# Allegro board AX7Z100B_PCB_Allegro.brd
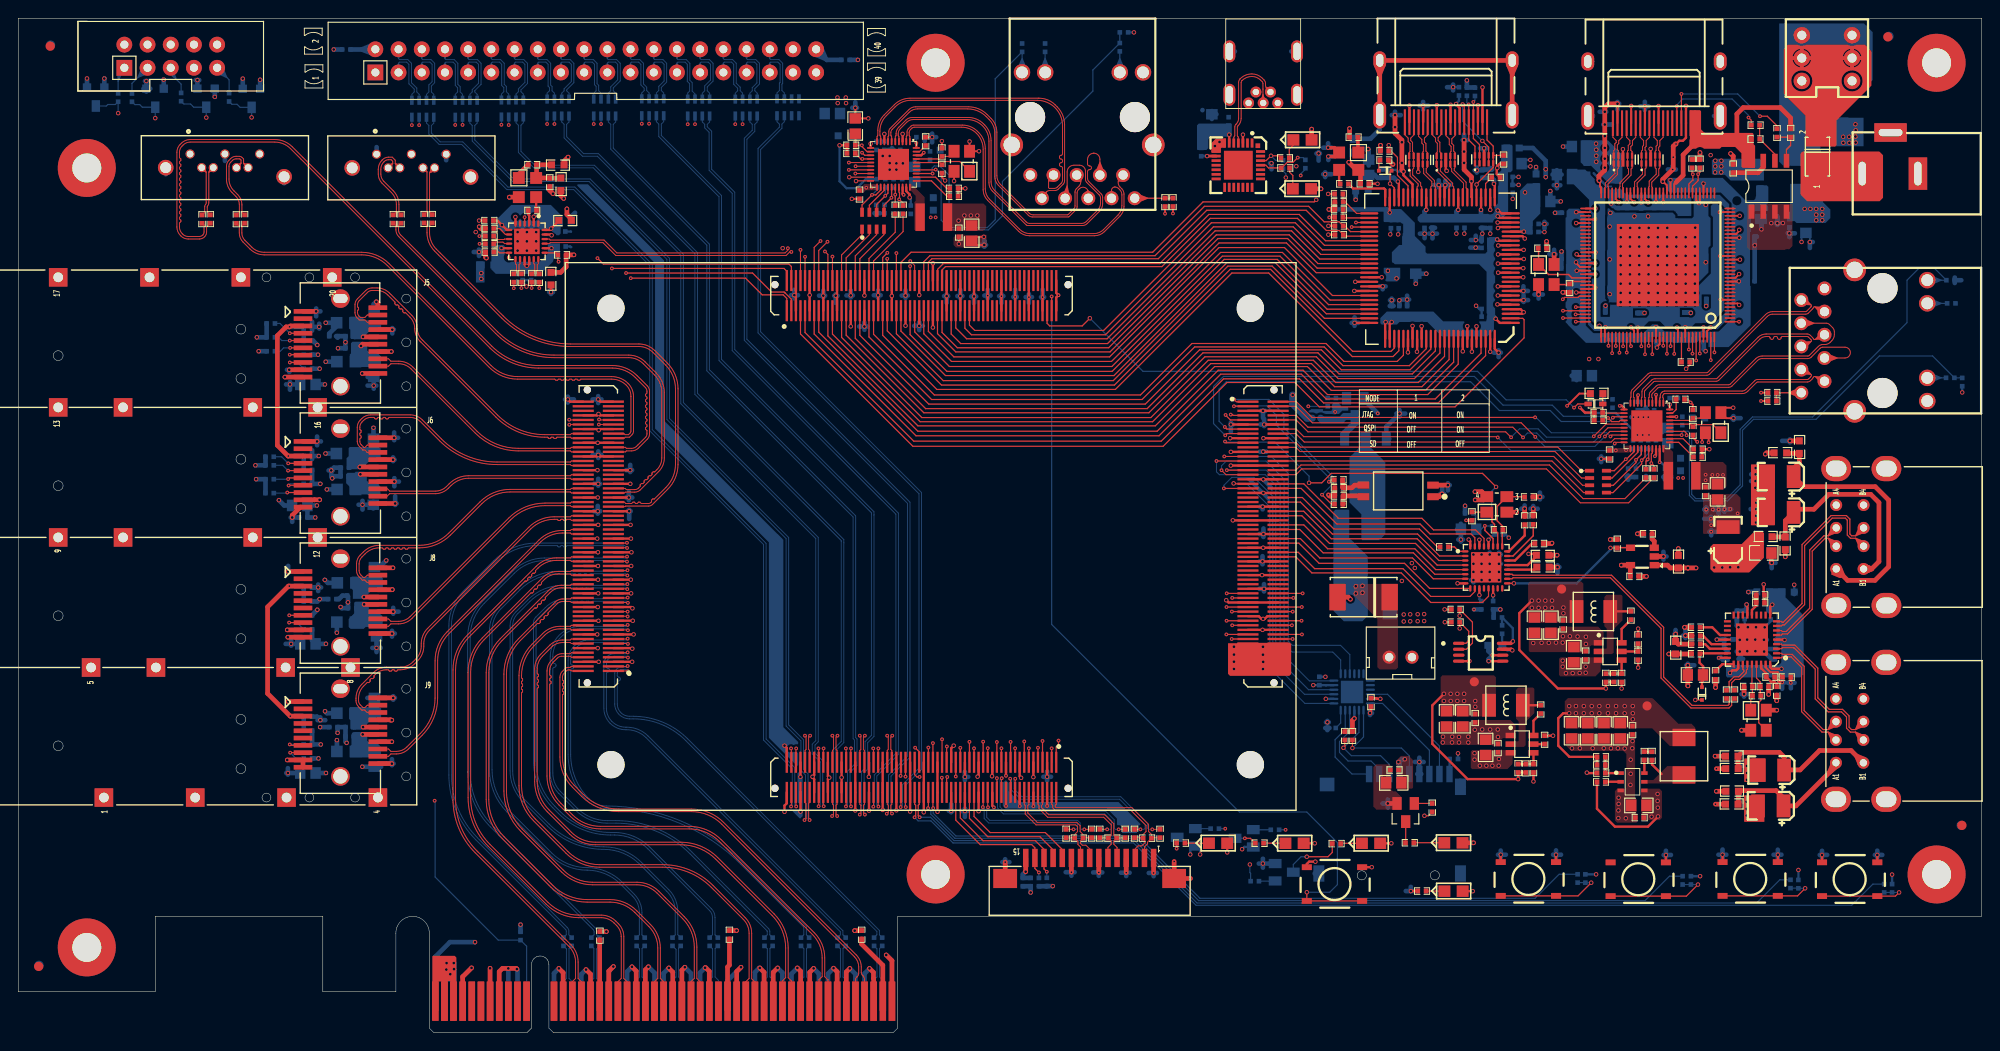
[diagram p0: board, top side]
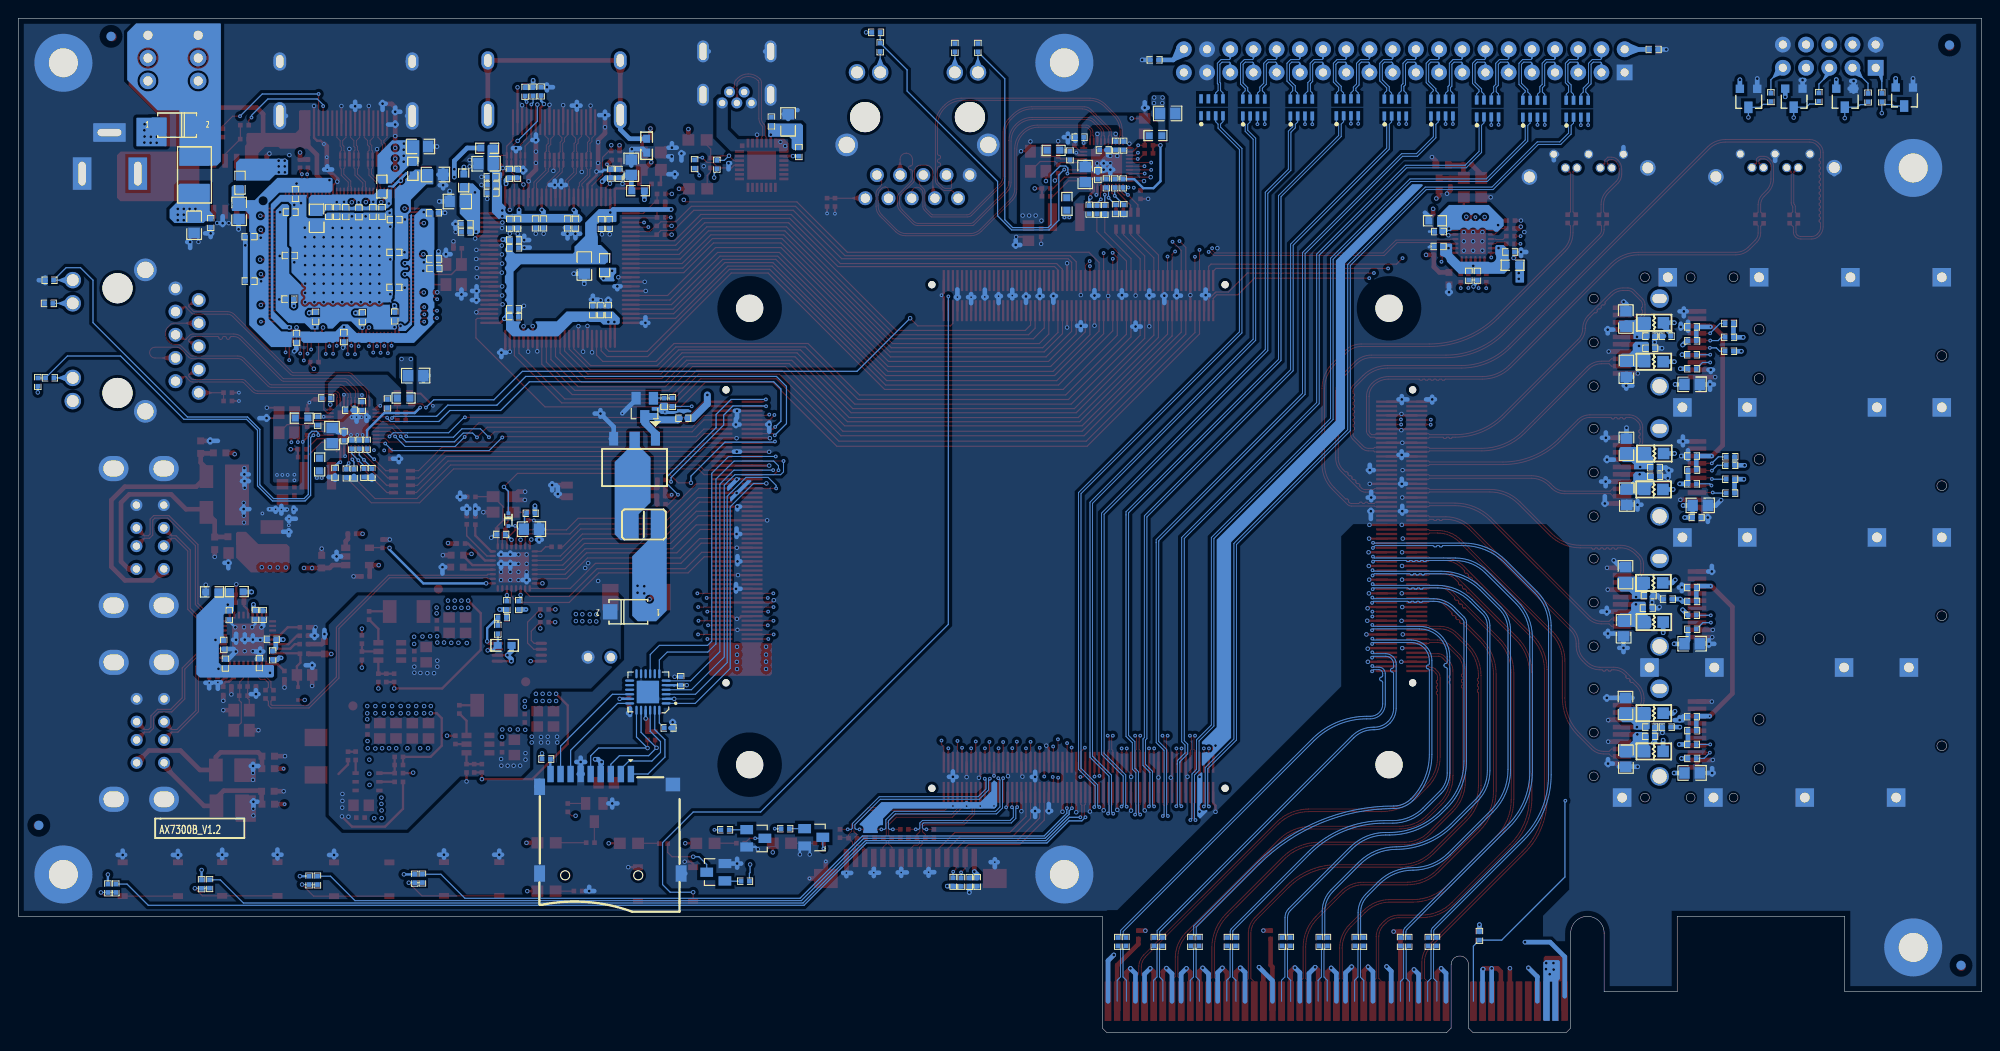
[diagram p1: board, bottom side, seen from below]

Outline 214.96 x 111.15 mm; copper layers: TOP, L2_GND, L3, L4_VCC, L5_GND, BOTTOM. Coordinates in mm from the lower left corner of the outline.
Outline path: 0,111.15 0,4.5 15,4.5 15,12.75 33.34,12.75 33.34,4.5 41.34,4.5 41.34,10.92 arc(43.17,12.75) 45,10.92 45,0.51 45.51,0 55.68,0 56.19,0.51 56.19,7.45 arc(57.14,8.41) 58.09,7.45 58.09,0.51 58.6,0 95.77,0 96.28,0.51 96.28,12.75 214.96,12.75 214.96,111.15 0,111.15

## Design rules (mm)
net group DP5: nets N23471993 N23471995
net group DP6: nets N23472019 N23472037
net group DP7: nets N23472053 N23472055
net group DP8: nets N23472069 N23472089
net group GTX_CLK0_C_N: nets GTX_CLK0_C_N GTX_CLK0_C_P
net group GTX_CLK1_C_P: nets GTX_CLK1_C_N GTX_CLK1_C_P
net group GTX_CLK2_C_P: nets GTX_CLK2_C_N GTX_CLK2_C_P
net group IO1_12P: nets IO1_12N IO1_12P
net group IO1_16P: nets IO1_16N IO1_16P
net group LP_CLK_P: nets LP_CLK_N LP_CLK_P
net group LP_LANE0_N: nets LP_LANE0_N LP_LANE0_P
net group LP_LANE1_N: nets LP_LANE1_N LP_LANE1_P
net group PCIE_RX4: nets PCIE_RX4_N PCIE_RX4_P
net group PCIE_RX5: nets PCIE_RX5_N PCIE_RX5_P
net group PCIE_RX6: nets PCIE_RX6_N PCIE_RX6_P
net group PCIE_RX7: nets PCIE_RX7_N PCIE_RX7_P
net group PCIE_TX4: nets PCIE_TX4_N PCIE_TX4_P
net group PCIE_TX5: nets PCIE_TX5_N PCIE_TX5_P
net group PCIE_TX6: nets PCIE_TX6_N PCIE_TX6_P
net group PCIE_TX7: nets PCIE_TX7_N PCIE_TX7_P
net group PHY1_MDI0: nets PHY1_MDI0_N PHY1_MDI0_P
net group PHY1_MDI1: nets PHY1_MDI1_N PHY1_MDI1_P
net group PHY1_MDI2: nets PHY1_MDI2_N PHY1_MDI2_P
net group PHY1_MDI3: nets PHY1_MDI3_N PHY1_MDI3_P
net group PHY2_MDI0: nets PHY2_MDI0_N PHY2_MDI0_P
net group PHY2_MDI1: nets PHY2_MDI1_N PHY2_MDI1_P
net group PHY2_MDI2: nets PHY2_MDI2_N PHY2_MDI2_P
net group PHY2_MDI3: nets PHY2_MDI3_N PHY2_MDI3_P
net group USB: nets N16523963 N16524061
net group 90OHM: nets DN1 DN2 DN3 DN4 DP1 DP2 DP3 DP4 OTG_D_N OTG_D_P USB_DM USB_DP
net group ETH_RX: nets PHY1_RXCK PHY1_RXCTL PHY1_RXD0 PHY1_RXD1 PHY1_RXD2 PHY1_RXD3 PHY2_RXCK PHY2_RXCTL PHY2_RXD0 PHY2_RXD1 PHY2_RXD2 PHY2_RXD3
net group ETH_TX: nets PHY1_TXCK PHY1_TXCTL PHY1_TXD0 PHY1_TXD1 PHY1_TXD2 PHY1_TXD3 PHY2_TXCK PHY2_TXCTL PHY2_TXD0 PHY2_TXD1 PHY2_TXD2 PHY2_TXD3
net group HDMI: nets HDMI_TX0+ HDMI_TX0- HDMI_TX1+ HDMI_TX1- HDMI_TX2+ HDMI_TX2- HDMI_TXC+ HDMI_TXC- RX_0N RX_0P RX_1N RX_1P RX_2N RX_2P RX_CN RX_CP
net group IO1-DIFF: nets B12_L1_N B12_L1_P B12_L2_N B12_L2_P EX_IO1_1N EX_IO1_1P EX_IO1_2N EX_IO1_2P EX_IO1_3N EX_IO1_3P EX_IO1_4N EX_IO1_4P EX_IO1_5N EX_IO1_5P EX_IO1_6N EX_IO1_6P EX_IO1_7N EX_IO1_7P EX_IO1_8N EX_IO1_8P EX_IO1_9N EX_IO1_9P EX_IO1_10N EX_IO1_10P EX_IO1_11N EX_IO1_11P EX_IO1_12N EX_IO1_12P EX_IO1_13N EX_IO1_13P EX_IO1_14N EX_IO1_14P EX_IO1_15N EX_IO1_15P EX_IO1_16N EX_IO1_16P EX_IO1_17N EX_IO1_17P FAN_PWM IO1_3N IO1_3P IO1_4N IO1_4P IO1_5N IO1_5P IO1_6N IO1_6P IO1_7N IO1_7P IO1_8N IO1_8P IO1_9N IO1_9P IO1_10N IO1_10P IO1_11N IO1_11P IO1_13N IO1_13P IO1_14N IO1_14P IO1_15N IO1_15P IO1_17N IO1_17P
net group MIPI: nets MIPI_CLK_N MIPI_CLK_P MIPI_LAN0_N MIPI_LAN0_P MIPI_LAN1_N MIPI_LAN1_P
net group OTG_DATA: nets OTG_CLK OTG_DATA0 OTG_DATA1 OTG_DATA2 OTG_DATA3 OTG_DATA4 OTG_DATA5 OTG_DATA6 OTG_DATA7 OTG_DIR OTG_NXT OTG_STP
net group PCIE: nets N23088557 N23088559 N23088561 N23088563 N23088565 N23088567 N23088569 N23088571 N23088604 N23088606
net group SATA-DIFF: nets GTX_CLK0_N GTX_CLK0_P GTX_CLK1_N GTX_CLK1_P GTX_CLK2_N GTX_CLK2_P REF_CLK0_N REF_CLK0_P SATA1_RX_N SATA1_RX_P SATA1_TX_C_N SATA1_TX_C_P SATA2_RX_C_N SATA2_RX_C_P SATA2_RX_N SATA2_RX_P SATA2_TX_N SATA2_TX_P
net group SD_D: nets SD_CLK SD_CMD SD_D0 SD_D1 SD_D2 SD_D3
nets with their own width: min track width 0.203; nets GND
nets with their own width: min track width 0.254; nets +3.3V

## Placement (name value [footprint] x y rotation side)
C92  18pF  [C0402]  166.86 85.94 0 top
C93  18pF  [C0402]  169.84 81.59 270 top
C94  10uF  [C0805]  170.93 97.09 180 bottom
C95  10uF  [C0805]  169.29 94.02 180 bottom
C96  0.1uF  [C0402]  185.13 89.91 180 bottom
C97  0.1uF  [C0402]  173.8 81.66 0 bottom
C98  0.1uF  [C0402]  185.27 80.38 180 bottom
C99  0.1uF  [C0402]  173.77 89.09 0 bottom
C100  0.1uF  [C0402]  173.75 78.49 90 bottom
C101  0.1uF  [C0402]  177.29 78.4 90 bottom
C102  0.1uF  [C0402]  185.23 85.16 180 bottom
C103  0.1uF  [C0402]  173.8 85.5 0 bottom
C104  0.1uF  [C0402]  182.42 78.46 90 bottom
C105  10uF  [C0805]  190.79 89.99 270 bottom
C106  0.1uF  [C0402]  169.39 83.73 180 bottom
C107  0.1uF  [C0402]  179.32 76.19 270 bottom
C108  0.1uF  [C0402]  184.61 91.88 270 bottom
C109  0.1uF  [C0402]  169.45 89.84 180 bottom
C110  0.1uF  [C0402]  184.5 76.13 270 bottom
C111  0.1uF  [C0402]  169.42 84.77 180 bottom
C112  0.1uF  [C0402]  189.66 87.23 0 bottom
C113  0.1uF  [C0402]  189.65 82.35 0 bottom
C114  10uF  [C0805]  182.31 89.24 270 bottom
C115  0.1uF  [C0402]  180.97 89.92 270 bottom
C116  0.1uF  [C0402]  180.1 89.92 270 bottom
C117  0.1uF  [C0402]  175.13 89.91 270 bottom
C118  0.1uF  [C0402]  177.67 89.87 270 bottom
C119  0.1uF  [C0402]  176.14 89.91 270 bottom
C120  0.1uF  [C0402]  179.11 89.9 270 bottom
C144  0.1uF  [C0402]  110.84 16.51 270 bottom
C145  1uF  [C0402]  109.98 16.51 270 bottom
C146  0.1uF  [C0402]  176.73 33.14 270 top
C147  22uF  [C0805]  175.39 33.09 270 top
C151  22pF  [C0402]  173.3 30.23 0 top
C152  0.1uF/25V  [C0402]  177.5 23.57 180 top
C154  22uF/25V  [C0805]  177.42 24.92 180 top
C156  0.1uF  [C0402]  35.91 107.73 180 bottom
C157  0.1uF  [C0402]  90.57 106.59 0 bottom
C276  0.1uF  [C0402]  59.69 9.97 90 bottom
C277  0.1uF  [C0402]  60.58 9.97 90 bottom
C278  0.1uF  [C0402]  62.74 9.97 90 bottom
C279  0.1uF  [C0402]  63.63 9.97 90 bottom
C280  0.1uF  [C0402]  67.7 9.97 90 bottom
C281  0.1uF  [C0402]  68.58 9.97 90 bottom
C282  0.1uF  [C0402]  71.63 9.97 90 bottom
C283  0.1uF  [C0402]  72.52 9.97 90 bottom
C284  0.1uF  [C0402]  75.7 9.97 90 bottom
C285  0.1uF  [C0402]  76.59 9.97 90 bottom
C286  0.1uF  [C0402]  81.7 9.97 90 bottom
C287  0.1uF  [C0402]  82.59 9.97 90 bottom
C288  0.1uF  [C0402]  85.7 9.97 90 bottom
C289  0.1uF  [C0402]  86.59 9.97 90 bottom
C290  0.1uF  [C0402]  89.7 9.97 90 bottom
C291  0.1uF  [C0402]  90.59 9.97 90 bottom
C292  0.1uF  [C0402]  93.7 9.97 90 bottom
C293  0.1uF  [C0402]  94.59 9.97 90 bottom
C294  10uF  [C0805]  38.92 72.68 270 bottom
C295  0.1uF  [C0402]  36.28 74.99 180 bottom
C296  10uF  [C0805]  38.96 78.2 90 bottom
C323  4.7uF  [C0603]  187.64 26.46 180 top
C324  4.7uF  [C0603]  187.6 30.3 180 top
C325  2.2uF  [C0603]  166.89 52.32 0 top
C326  0.1uF  [C0402]  189.01 45.78 270 bottom
C327  0.1uF  [C0402]  160.17 46.84 270 bottom
C328  0.1uF  [C0402]  162.1 54.59 0 bottom
C329  0.1uF  [C0402]  161.47 46.84 270 bottom
C330  4.7uF  [C0603]  195 64.16 90 top
C331  4.7uF  [C0603]  193.46 53.62 270 top
C332  10uF  [C0805]  183.62 39.2 180 top
C333  2.2uF  [C0603]  181.44 42.18 90 top
C334  0.01uF  [C0402]  188.16 45.77 270 bottom
C335  0.01uF  [C0402]  187.22 43.1 0 bottom
C336  0.01uF  [C0402]  192.29 40.46 90 bottom
C337  0.01uF  [C0402]  192.47 42.5 270 bottom
C338  0.01uF  [C0402]  191.87 45.73 270 bottom
C339  0.01uF  [C0402]  188.57 40.5 90 bottom
C340  10uF  [C0805]  158.78 55.17 180 bottom
C341  4.7uF  [C0603]  166.94 51.01 180 top
C342  18pF  [C0402]  159.15 56.6 90 top
C343  18pF  [C0402]  165.37 58.71 180 top
C344  1uF  [C0402]  192.52 37.45 270 top
C345  0.1uF  [C0402]  191.84 38.98 0 top
C346  1uF  [C0402]  190.72 47.97 0 top
C347  0.1uF  [C0402]  190.72 47.12 0 top
C348  18pF  [C0402]  189.4 37.94 0 top
C349  18pF  [C0402]  191.18 37.94 180 top
C350  22uF  [C0805]  191.1 52.56 0 top
C351  100uF  [TAN-SMB]  187.19 54 270 top
C352  4.7uF  [C0603]  181.75 51.61 90 top
C353  0.1uF  [C0402]  176.94 50 0 top
C354  22uF  [C0805]  30.82 57.77 180 bottom
C355  0.1uF  [C0402]  35.74 60.97 180 bottom
C356  0.1uF  [C0402]  31.2 56.45 180 bottom
C357  22uF  [C0805]  31.71 42.61 180 bottom
C358  1uF  [C0402]  132.51 99.85 90 bottom
C361  10uF  [C0805]  130.68 99.79 90 bottom
C362  10uF  [C0805]  150.59 27.39 180 top
C363  0.1uF  [C0402]  150.67 28.78 180 top
C364  0.1uF  [C0402]  142.44 38.54 90 bottom
C365  0.1uF  [C0402]  148.1 36.2 270 top
C366  4.7uF  [C0603]  58.33 82.62 270 top
C367  0.1uF  [C0402]  34.38 47.51 0 bottom
C368  0.1uF  [C0402]  58.18 93.17 270 top
C369  4.7uF  [C0603]  59.85 88.93 0 bottom
C370  0.1uF  [C0402]  51.56 88.99 180 top
C371  0.1uF  [C0402]  59.43 87.78 0 bottom
C372  4.7uF  [C0603]  59.07 95.08 0 top
C373  0.1uF  [C0402]  51.61 85.54 180 bottom
C374  0.1uF  [C0402]  55.21 82.93 270 bottom
C375  0.1uF  [C0402]  56.15 82.93 270 bottom
C376  0.1uF  [C0402]  35.77 61.91 180 bottom
C377  0.1uF  [C0402]  59.47 86.15 0 bottom
C378  10uF  [C0805]  38.89 64.25 90 bottom
C379  1uF  [C0402]  144.58 89.33 180 top
C380  1uF  [C0402]  144.57 91.9 180 top
C381  0.1uF  [C0402]  147.41 93.02 0 top
C382  0.01uF  [C0402]  160.32 94.13 90 bottom
C383  0.01uF  [C0402]  166 88.62 0 bottom
C384  1uF  [C0402]  165.98 87.74 0 bottom
C385  0.1uF  [C0402]  161.2 94.12 90 bottom
C386  0.1uF  [C0402]  150.07 94.13 90 bottom
C387  10uF  [C0805]  147.84 94.82 90 bottom
C388  0.01uF  [C0402]  149.21 94.12 90 bottom
C389  10uF  [C0805]  166.9 91.08 0 bottom
C390  0.01uF  [C0402]  150.28 88.6 270 bottom
C391  0.01uF  [C0402]  150.37 79.17 90 bottom
C392  0.01uF  [C0402]  160.67 79.3 180 bottom
C393  0.01uF  [C0402]  151.21 79.17 90 bottom
C394  0.01uF  [C0402]  152.06 79.16 90 bottom
C395  0.1uF  [C0402]  160.67 78.46 180 bottom
C396  0.1uF  [C0402]  160.66 86 180 bottom
C397  0.1uF  [C0402]  160.66 86.85 180 bottom
C398  1uF  [C0402]  151.12 88.59 270 bottom
C399  10uF  [C0805]  153 84 270 bottom
C400  0.01uF  [C0402]  163.14 92.89 0 bottom
C401  0.01uF  [C0402]  154.82 88.65 270 bottom
C402  0.01uF  [C0402]  163.15 93.77 0 bottom
C403  0.01uF  [C0402]  163.16 92.01 0 bottom
C404  0.01uF  [C0402]  160.29 88.63 270 bottom
C405  0.1uF  [C0402]  153.96 88.64 270 bottom
C406  0.1uF  [C0402]  158.33 88.65 270 bottom
C407  0.1uF  [C0402]  161.16 88.63 270 bottom
C408  1uF  [C0402]  157.47 88.65 270 bottom
C409  10uF  [C0805]  163.75 95.22 0 bottom
C436  0.1uF  [C0402]  161.99 45.49 180 bottom
C437  10uF  [C0805]  38.87 58.69 270 bottom
C438  0.1uF  [C0402]  36.28 76.32 180 bottom
C439  0.1uF  [C0402]  34.5 76.32 0 bottom
C440  10uF  [C0805]  38.99 50.18 90 bottom
C441  0.1uF  [C0402]  36.28 32.47 180 bottom
C442  0.1uF  [C0402]  36.45 47.89 180 bottom
C443  10uF  [C0805]  38.99 35.85 90 bottom
C444  10uF  [C0805]  39.22 44.26 270 bottom
C445  10uF  [C0805]  38.97 29.98 270 bottom
C446  0.1uF  [C0402]  36.55 46.52 180 bottom
C447  0.1uF  [C0402]  36.28 33.49 180 bottom
C448  0.1uF  [C0402]  34.5 33.49 0 bottom
C449  22uF  [C0805]  31.71 28.46 180 bottom
C450  22uF  [C0805]  31.71 71.03 180 bottom
C451  2.2uF  [C0603]  193.75 48.28 0 bottom
C452  100uF  [TAN-SMB]  191.87 24.86 0 top
C453  100uF  [TAN-SMB]  191.93 28.78 0 top
C454  100uF  [TAN-SMB]  192.97 57.01 0 top
C455  100uF  [TAN-SMB]  192.97 60.93 0 top
C456  0.1uF  [C0402]  51.6 86.44 180 top
C457  0.1uF  [C0402]  51.59 87.28 180 top
C458  0.1uF  [C0402]  55.09 82.69 270 top
C459  0.1uF  [C0402]  54.25 82.69 270 top
C460  0.1uF  [C0402]  57.04 82.68 270 top
C461  0.1uF  [C0402]  56.2 82.69 270 top
C466  0.1uF  [C0402]  20.12 89.14 90 top
C467  0.1uF  [C0402]  21.02 89.15 90 top
C468  0.1uF  [C0402]  24.77 89.15 90 top
C469  0.1uF  [C0402]  23.88 89.14 90 top
C470  0.1uF  [C0402]  41.9 89.15 90 top
C471  0.1uF  [C0402]  41.07 89.15 90 top
C472  0.1uF  [C0402]  44.44 89.17 90 top
C473  0.1uF  [C0402]  45.33 89.17 90 top
C648  10uF/25V  [C0805]  195.72 88.48 270 bottom
C649  0.1uF 25V  [C0402]  193.9 88.7 270 bottom
C673  0.1uF/25V  [C0402]  192.03 69.22 180 top
C674  1uF/25V  [C0402]  192.03 70.13 180 top
C675  18pF  [C0402]  183.34 65.94 270 top
C676  18pF  [C0402]  183.33 67.79 90 top
C681  100uF 25V  [D7343]  147.29 47.73 180 top
C795  0.1uF  [C0402]  94.82 97.18 270 bottom
C796  0.1uF  [C0402]  92.1 91.82 270 top
C797  0.1uF  [C0402]  96.11 96.72 180 bottom
C798  22uF  [C0805]  89.13 100.71 180 bottom
C799  0.1uF  [C0402]  98.78 98.12 0 bottom
C800  0.1uF  [C0402]  93.95 97.18 270 bottom
C801  22uF  [C0805]  98.15 94.03 90 bottom
C802  0.1uF  [C0402]  96.77 93.98 90 bottom
C803  0.1uF  [C0402]  97.71 90.17 270 bottom
C805  18pF  [C0402]  101.12 94.64 270 top
C806  18pF  [C0402]  101.12 96.47 90 top
C807  22uF  [C0805]  104.37 87.6 270 top
C808  0.1uF  [C0402]  102.98 87.66 270 top
C809  0.1uF  [C0402]  99.82 96.11 270 bottom
C810  10uF  [C0805]  91.64 99.34 90 top
C811  0.1uF/25V  [C0402]  126.42 90.98 270 top
C812  1uF/25V  [C0402]  125.55 90.98 270 top
C813  22uF  [C0805]  173.61 33.09 270 top
C814  22uF/25V  [C0805]  170.31 41.42 90 top
C815  0.01uF/25V  [C0402]  176.56 45.72 90 top
C816  150pF  [C0402]  173.81 38.88 270 top
C817  22uF  [C0805]  167.8 44.65 270 top
C818  22uF  [C0805]  165.99 44.65 270 top
C819  0.1uF  [C0402]  169.14 44.72 270 top
C820  0.1uF/25V  [C0402]  171.6 41.35 90 top
C825  22uF  [C0805]  170.05 33.09 270 top
C826  22uF  [C0805]  171.83 33.08 270 top
C1483  22uF  [C0805]  186.03 59.26 270 top
C1484  0.1uF  [C0402]  184.73 59.32 270 top
C1485  0.1uF  [C0402]  178.64 68.2 180 bottom
C1486  0.1uF  [C0402]  182.19 67.03 270 bottom
C1487  0.1uF  [C0402]  174.22 63.35 270 top
C1488  0.1uF  [C0402]  177.31 68.66 270 bottom
C1489  22uF  [C0805]  171.45 71.98 180 bottom
C1490  0.1uF  [C0402]  181.25 69.54 0 bottom
C1491  0.1uF  [C0402]  174.54 68.94 270 bottom
C1492  22uF  [C0805]  180.59 65.43 90 bottom
C1493  0.1uF  [C0402]  179.3 65.35 90 bottom
C1494  0.1uF  [C0402]  180.28 61.34 270 bottom
C1504  NC  [C0603]  172.8 70.03 180 top
C1505  0.1uF/25V  [C0402]  178.87 30.33 270 top
C1506  0.1uF/25V  [C0402]  162 31.19 90 top
C1507  22uF/25V  [C0805]  160.66 31.26 90 top
C1508  22uF  [C0805]  158.15 34.39 270 top
C1509  22uF  [C0805]  156.37 34.39 270 top
C1510  0.1uF  [C0402]  159.51 34.46 270 top
C1511  150pF  [C0402]  164.21 28.97 270 top
C1512  0.01uF/25V  [C0402]  166.68 35.43 90 top
CN2  AJ243-3-3C  [CN1-DCJACK]  207.98 94.13 90 top
D4  BAT54S  [SOT23]  7.52 103.56 0 bottom
D5  BAT54S  [SOT23]  14.03 103.43 0 bottom
D6  BAT54S  [SOT23]  19.61 103.43 0 bottom
D7  BAT54S  [SOT23]  24.58 103.42 0 bottom
D9  -  [BAS16XV2T1G]  161.31 56.22 270 bottom
D10  -  [BAS16XV2T1G]  184.33 37.16 90 top
D14  LED  [LED_0805]  131.36 20.76 270 top
D15  LED  [LED_0805]  139.73 20.75 270 top
D16  LED  [LED_0805]  148.11 20.75 270 top
D17  LED  [LED_0805]  157.12 20.81 270 top
D18  LED  [LED_0805]  157.14 15.51 270 top
D20  -  [BAS16XV2T1G]  149.66 94.44 180 top
D22  B340A  [DO-214AC]  148.17 46.12 0 bottom
D27  B340A  [DO-214AC]  197.57 99.44 180 bottom
D28  B340A  [DO-214AC]  196.98 95.99 90 top
D35  BAS16XV2T1G  [SOD-523]  172.67 68.89 270 top
F3  3A  [FUSE_1812]  195.67 93.99 270 bottom
J2  HR911130A  [GE_RJ45]  204.1 70.09 0 top
J3  DUAL USB  [DUAL_USB]  201.75 33.08 90 top
J4  DUAL USB  [DUAL_USB]  201.78 54.31 90 top
J5  SFP & CONN  [SFP_CON]  31.17 79.04 0 top
J6  SFP & CONN  [SFP_CON]  31.17 64.79 0 top
J7  HDMI IN  [HDMI_A_TYPE]  186.58 98.5 270 top
J8  SFP & CONN  [SFP_CON]  31.17 50.54 0 top
J9  SFP & CONN  [SFP_CON]  31.17 36.29 0 top
J10  CON15  [FPC100C047]  117.3 18.03 180 top
J11  MINI_USB  [MINI_USB_DIP]  136.3 102.77 180 top
J12  Micro SD  [MICRO_SD]  147.89 28.35 180 bottom
J13  HDMI Connector  [HDMI_A_TYPE]  163.81 98.62 270 top
J14  HR911130A  [GE_RJ45]  122.25 100.32 90 top
J15  HEADER 5X2  [JTAG-10]  11.61 105.72 0 top
J25  -  [CON2_2_54P]  152.59 41.15 180 top
J29  -  [AXK6A2337YG]  98.89 27.98 180 top
J30  -  [AXK6A2337YG]  63.5 54.39 90 top
J31  -  [AXK6A2337YG]  98.89 80.76 0 top
J32  -  [AXK6A2337YG]  136.28 54.39 270 top
J33  HEADER 20x2/M  [IDC-40J]  63.22 106.48 0 top
J34  CON9  [SATA-7]  22.62 96.28 180 top
J35  CON9  [SATA-7]  43.04 96.26 180 top
KEY2  Button  [KEY_4X4X1_5]  165.33 16.85 180 top
KEY3  Button  [KEY_4X4X1_5]  144.1 16.29 180 top
KEY4  Button  [KEY_4X4X1_5]  177.36 16.82 180 top
KEY5  Button  [KEY_4X4X1_5]  189.61 16.85 180 top
KEY6  Button  [KEY_4X4X1_5]  200.51 16.82 180 top
L7  BLM18SG121TN1  [L0603]  187.6 25.04 180 top
L8  BLM18SG121TN1  [L0603]  187.62 28.93 180 top
L9  BLM18SG121TN1  [L0603]  192.92 63.53 180 top
L10  BLM18SG121TN1  [L0603]  191.33 54.35 180 top
L11  BLM18SG121TN1  [L0603]  171.74 94.67 270 bottom
L12  BLM18SG121TN1  [L0603]  190.66 93.14 270 bottom
L13  BLM18SG121TN1  [L0603]  175.13 92.72 270 bottom
L14  BLM18SG121TN1  [L0603]  59.41 92.96 90 top
L15  BLM18SG121TN1  [L0603]  166.17 93.4 270 bottom
L16  BLM18SG121TN1  [L0603]  147.1 92.23 0 bottom
L17  BLM18SG121TN1  [L0603]  150.79 84.08 90 bottom
L18  BLM18SG121TN1  [L0603]  163.64 96.93 180 bottom
L22  220Ohm@100MHz  [L0805]  35.89 45 0 bottom
L23  220Ohm@100MHz  [L0805]  35.94 49.29 0 bottom
L24  220Ohm@100MHz  [L0805]  35.9 30.82 0 bottom
L25  220Ohm@100MHz  [L0805]  35.9 35.01 0 bottom
L26  220Ohm@100MHz  [L0805]  35.87 77.79 0 bottom
L27  220Ohm@100MHz  [L0805]  35.84 63.46 0 bottom
L28  220Ohm@100MHz  [L0805]  35.92 59.52 0 bottom
L29  220Ohm@100MHz  [L0805]  35.9 73.52 0 bottom
L31  BLM18SG121TN1  [L0603]  191.03 48.31 0 bottom
L36  BLM18SG121TN1  [L0603]  51.38 84.12 180 bottom
L44  BLM18SG121TN1  [L0603]  59.87 89.01 0 top
L62  2.2uH  [LVS303010]  181.17 61.03 270 top
L63  120OHM@100Mhz  [L0603]  172.77 69.52 0 bottom
L64  120OHM@100Mhz  [L0603]  183.95 67.36 180 bottom
L65  120OHM@100Mhz  [L0603]  181.99 62.26 90 bottom
L66  2.2uH  [LVS303010]  99.24 89.36 270 top
L67  120OHM@100Mhz  [L0603]  90.45 98.27 0 bottom
L68  120OHM@100Mhz  [L0603]  101.63 96.7 180 bottom
L69  120OHM@100Mhz  [L0603]  100.18 90.81 90 bottom
L70  CMLE051E-2R2MS  [L5_4X5_2]  182.36 30.3 90 top
L71  CMLB041B-4R7MS  [L4_4X4_2]  172.45 46.15 270 top
L72  CMLB041B-4R7MS  [L4_4X4_2]  162.87 35.88 270 top
LED1  RED  [LED_0805]  140.6 97.82 270 top
LED2  RED  [LED_0805]  140.54 92.46 270 top
NOREF  -  [unnamed]  3.5 108.09 180 top
NOREF#2  -  [#2]  0.12 110.26 0 top
NOREF#3  -  [#2]  332.3 72.89 0 top
NOREF#4  -  [unnamed]  212.79 22.72 180 top
NOREF#5  -  [unnamed]  2.23 7.27 180 top
NOREF#6  -  [#2]  213.99 12.77 90 top
NOREF#7  -  [unnamed]  204.69 109.11 180 top
NOREF#8  -  [unnamed#3]  99.89 54.37 180 top
NOREF#9  -  [unnamed]  2.27 7.39 0 bottom
NOREF#10  -  [unnamed]  3.53 108.21 0 bottom
NOREF#11  -  [unnamed]  212.72 22.73 0 bottom
NOREF#12  -  [unnamed]  204.81 109.17 0 bottom
P1  PCIeX8  [PCIE_8LANE_EDGE]  45.65 3.51 0 top
Q9  MMBT3904LT1G  [SOT-23]  127.89 21.41 0 bottom
Q10  MMBT3904LT1G  [SOT-23]  134.23 21.31 0 bottom
Q11  MMBT3904LT1G  [SOT-23]  138.59 17.58 180 bottom
Q12  MMBT3904LT1G  [SOT-23]  151.9 24.14 90 top
Q13  MMBT3904LT1G  [SOT-23]  146.37 68.53 90 bottom
Q14  NDT3055L  [SOT-223]  147.49 61.93 0 bottom
R19  10K  [R0402]  144.59 59.7 0 top
R20  10K  [R0402]  144.59 58.81 0 top
R21  20K/1%  [R0402]  144.56 57.91 180 top
R22  20K/1%  [R0402]  144.54 60.57 180 top
R57  33R  [R0402]  182.55 73.48 180 top
R58  10K  [R0402]  187.76 94.68 270 top
R59  33R  [R0402]  190.19 99.44 180 top
R60  33R  [R0402]  192.56 98.59 90 top
R61  4.7K  [R0402]  194.04 98.58 270 top
R62  4.7K  [R0402]  190.21 97.91 0 top
R90  100  [R0402]  125.01 21.83 90 top
R91  150  [R0402]  123.61 21.32 0 top
R92  100  [R0402]  122.21 21.83 90 top
R93  100  [R0402]  121.2 21.83 90 top
R94  150  [R0402]  119.8 21.32 0 top
R95  100  [R0402]  118.4 21.83 90 top
R96  100  [R0402]  117.51 21.83 90 top
R97  4.7K  [R0402]  54.99 10.6 270 bottom
R98  0R  [R0402]  63.67 10.63 270 top
R99  0R  [R0402]  77.86 10.73 270 top
R100  0R  [R0402]  92.34 10.73 270 top
R101  33R  [R0402]  10.94 102.46 270 bottom
R102  33R  [R0402]  23.08 102.49 270 bottom
R103  33R  [R0402]  12.45 102.45 270 bottom
R104  33R  [R0402]  17.83 102.51 270 bottom
R105  NC  [R0402]  31.71 77.33 180 bottom
R106  4.7K  [R0402]  31.71 75.8 0 bottom
R123  1.5K/1%  [R0402]  158.86 56.91 180 bottom
R124  1.5K/1%  [R0402]  183.67 41.52 180 top
R125  10K  [R0402]  187.11 41.36 90 bottom
R126  10K  [R0402]  185.82 39.18 90 top
R127  33R  [R0402]  156.12 53.24 0 top
R128  1K  [R0402]  166.5 53.6 180 top
R129  22  [R0402]  187.02 37.07 90 top
R130  22  [R0402]  187.89 37.08 90 top
R131  10K  [R0402]  165.86 56.16 90 top
R132  10K  [R0402]  183.67 44.42 0 top
R133  10K  [R0402]  183.69 43.5 0 top
R134  10K  [R0402]  183.7 42.58 0 top
R135  1M  [R0402]  162.08 55.11 180 top
R136  8K06  [R0402]  164.92 56.13 270 top
R137  12K 1%  [R0402]  193.61 38.97 180 top
R138  1M  [R0402]  190.32 36.93 180 top
R139  100K/1%  [R0402]  178.42 54.67 0 top
R140  10K  [R0402]  175.07 53.58 270 top
R143  10K  [R0402]  129.51 96.49 90 bottom
R144  510R  [R0402]  138.7 95.84 0 top
R145  510R  [R0402]  138.73 94.75 0 top
R146  NC  [R0402]  146.07 32.53 90 top
R147  4.99K  [R0402]  145.23 32.53 90 top
R148  4.7K  [R0402]  143.78 33.39 0 bottom
R149  150  [R0402]  116.12 21.32 0 top
R150  100  [R0402]  114.72 21.83 90 top
R151  33R  [R0402]  56.29 90.09 0 top
R152  10K  [R0402]  56.29 95.1 0 top
R154  1K  [R0402]  51.62 85.54 0 top
R155  1K  [R0402]  59.53 85.23 180 top
R156  1K  [R0402]  51.61 88.11 0 top
R157  27K  [R0402]  149.55 95.62 180 top
R158  49R9  [R0402]  144.6 90.2 0 top
R159  49R9  [R0402]  144.6 91.04 0 top
R160  2K  [R0402]  158.6 103.11 270 bottom
R161  2K  [R0402]  159.48 103.09 270 bottom
R162  0R  [R0603]  146.17 97.19 270 bottom
R163  NC  [R0402]  157.73 103.14 90 bottom
R164  10K  [R0402]  162.61 95.66 270 top
R165  2K  [R0402]  144.61 87.44 0 top
R166  2K  [R0402]  144.6 88.4 0 top
R167  2K  [R0402]  149.58 96.61 0 top
R168  33R  [R0402]  145.17 93 0 top
R169  10K  [R0402]  146.21 98.12 0 top
R170  887  [R0402]  161.78 93.71 0 top
R186  NC  [R0402]  157.35 44.98 180 top
R187  NC  [R0402]  157.35 46.38 180 top
R188  NC  [R0402]  31.71 63.19 180 bottom
R189  4.7K  [R0402]  31.71 72.76 0 bottom
R190  4.7K  [R0402]  31.71 47.25 0 bottom
R191  4.7K  [R0402]  31.71 45.74 180 bottom
R192  4.7K  [R0402]  31.71 30.06 0 bottom
R193  NC  [R0402]  31.71 48.78 180 bottom
R194  4.7K  [R0402]  31.71 31.59 180 bottom
R195  NC  [R0402]  31.71 34.63 180 bottom
R196  4.7K  [R0402]  31.71 44.2 0 bottom
R197  4.7K  [R0402]  31.71 33.1 0 bottom
R198  NC  [R0402]  157.17 29.99 0 bottom
R199  4.7K  [R0402]  112.61 16.52 270 bottom
R200  4.7K  [R0402]  111.74 16.51 270 bottom
R207  NC  [R0402]  162.45 44.17 90 bottom
R208  0R  [R0603]  161.72 42.44 0 bottom
R209  4.7K  [R0402]  31.71 61.65 0 bottom
R210  4.7K  [R0402]  27.52 59.12 180 bottom
R211  4.7K  [R0402]  31.71 60.14 180 bottom
R212  4.7K  [R0402]  31.71 74.29 180 bottom
R213  4.7K  [R0402]  27.65 77.71 180 bottom
R214  4.7K  [R0402]  27.65 76.19 180 bottom
R217  4.7K  [R0402]  27.65 74.67 180 bottom
R218  4.7K  [R0402]  27.51 63.11 180 bottom
R219  4.7K  [R0402]  27.52 62.17 180 bottom
R220  4.7K  [R0402]  27.52 60.65 180 bottom
R222  4.7K  [R0402]  184.12 95.22 270 top
R223  4.7K  [R0402]  183.25 95.22 270 top
R224  0R  [R0402]  138.48 95.12 90 bottom
R225  0R  [R0402]  140.92 95.17 90 bottom
R281  1K  [R0402]  131 22.36 0 bottom
R282  1K  [R0402]  170.72 16.91 90 bottom
R283  10K  [R0402]  171.57 16.9 90 bottom
R286  330R  [R0402]  127.28 20.78 180 top
R287  1K  [R0402]  137.58 22.23 0 bottom
R288  330R  [R0402]  135.89 20.77 180 top
R289  1K  [R0402]  135.38 16.61 180 bottom
R290  330R  [R0402]  144.32 20.72 180 top
R291  330R  [R0402]  153.68 15.52 180 top
R294  1K  [R0402]  154.81 24.66 270 top
R295  330R  [R0402]  152.33 20.82 180 top
R296  10K  [R0402]  183.13 16.69 90 bottom
R297  1K  [R0402]  182.21 16.69 90 bottom
R298  10K  [R0402]  194.9 16.28 90 bottom
R299  1K  [R0402]  194.03 16.3 90 bottom
R300  10K  [R0402]  205.15 15.83 90 bottom
R301  1K  [R0402]  204.29 15.83 90 bottom
R427  1K  [R0402]  142.13 67.33 180 bottom
R430  1K  [R0402]  143.35 69.09 270 bottom
R434  10K  [R0402]  144.25 69.08 270 bottom
R435  10R  [R1210]  146.47 55.69 180 bottom
R443  1.5K/1%  [R0402]  91.19 96.34 180 top
R445  4.7K  [R0402]  102.44 92.51 0 top
R446  4.7K  [R0402]  109.91 107.92 90 bottom
R447  4.7K  [R0402]  121.06 109.6 0 bottom
R448  33R  [R0402]  96.88 90.17 270 top
R449  33R  [R0402]  96.01 90.17 270 top
R450  2.49K/1%  [R0402]  99.34 97.66 270 top
R451  510R  [R0402]  112.42 107.92 90 bottom
R452  510R  [R0402]  120.6 107.98 90 bottom
R453  NC  [R0402]  93.93 90.25 90 bottom
R454  NC  [R0402]  94.83 90.25 90 bottom
R455  4.7K  [R0402]  95.83 93.07 90 bottom
R456  4.7K  [R0402]  94.92 93.07 90 bottom
R457  4.7K  [R0402]  94.01 93.07 90 bottom
R458  4.7K  [R0402]  96.86 90.17 90 bottom
R459  4.7K  [R0402]  96.01 90.17 90 bottom
R460  100K/1%  [R0402]  91.19 97.23 180 top
R461  4.7K  [R0402]  102.44 91.64 180 top
R466  15K 1%  [R0402]  175.54 38.88 270 top
R467  18.7K/1%  [R0402]  174.68 38.88 90 top
R468  NC  [R0402]  177.34 43.09 270 top
R470  10R  [R0402]  178.03 30.34 90 top
R471  20K/1%  [R0402]  173.3 27.48 0 top
R472  75K_1%  [R0402]  173.3 29.34 0 top
R473  10K/1%  [R0402]  173.3 28.45 180 top
R1025  4.7K  [R0402]  183.86 63.07 180 top
R1026  100K/1%  [R0402]  173.01 67.95 180 top
R1027  1.5K/1%  [R0402]  173.01 67.11 180 top
R1028  4.7K  [R0402]  183.88 63.93 0 top
R1029  4.7K  [R0402]  212.83 71.29 270 bottom
R1030  4.7K  [R0402]  211.56 82.45 0 bottom
R1031  33R  [R0402]  179.07 61.28 270 top
R1032  33R  [R0402]  178.21 61.28 270 top
R1033  2.49K/1%  [R0402]  181.97 69.39 180 top
R1034  510R  [R0402]  211.63 79.91 0 bottom
R1035  510R  [R0402]  211.52 71.76 0 bottom
R1036  NC  [R0402]  177.11 61.34 90 bottom
R1037  NC  [R0402]  176.25 61.34 90 bottom
R1038  4.7K  [R0402]  177.62 64.44 90 bottom
R1039  4.7K  [R0402]  178.46 64.44 90 bottom
R1040  4.7K  [R0402]  176.78 64.44 90 bottom
R1041  4.7K  [R0402]  179.04 61.29 90 bottom
R1042  4.7K  [R0402]  178.21 61.29 90 bottom
R1043  10K/1%  [R0402]  167.11 32.09 270 top
R1044  56.2K/1%  [R0402]  165.05 28.97 90 top
R1045  18K 1%  [R0402]  165.89 28.97 270 top
R1046  10K/1%  [R0402]  177.34 41.32 90 top
RN1  33R  [RN-8P]  45.49 100.31 90 bottom
RN2  33R  [RN-8P]  50.24 100.31 90 bottom
RN3  33R  [RN-8P]  55.3 100.34 90 bottom
RN4  33R  [RN-8P]  60.3 100.44 90 bottom
RN5  33R  [RN-8P]  65.4 100.44 90 bottom
RN6  33R  [RN-8P]  70.66 100.46 90 bottom
RN7  33R  [RN-8P]  75.69 100.44 90 bottom
RN8  33R  [RN-8P]  80.9 100.44 90 bottom
RN9  33R  [RN-8P]  85.47 100.46 90 bottom
RN11  33R  [RN-8P]  92.38 88.04 90 top
RN19  33R  [RN-8P]  172.03 61.58 0 top
S1  Screw_2.9  [MH_250H125]  7.5 94.75 0 top
S2  Screw_2.9  [MH_250H125]  7.5 9.35 0 top
S3  Screw_2.9  [MH_250H125]  210.02 17.34 0 top
S4  Screw_2.9  [MH_250H125]  210.02 106.27 0 top
S5  Screw_2.9  [MH_250H125]  100.44 17.34 0 top
S6  Screw_2.9  [MH_250H125]  100.44 106.27 0 top
SW1  SW DIP-2  [2P2_1_27MM]  151.08 59.36 90 top
SW2  Power Switch  [POWER_SW]  195.27 106.79 180 top
TP1  NC  [MARK]  178.32 35.81 0 top
TP3  NC  [MARK]  168.97 48.61 0 top
TP4  NC  [MARK]  159.41 38.45 0 top
U9  SiI9013/9011  [QFP-128HPAD]  179.5 84.11 180 top
U10  24C02  [SO8]  189.78 89.95 90 top
U13  JL2121-N040I  [QFN40-5X5]  175.81 68.99 270 top
U14  -  [USB3320C]  160.72 50.99 0 top
U15  USB2514  [QFN-37]  189.81 43.07 90 top
U16  -  [TPS2051BDBV]  179.12 51.23 180 top
U20  CP2102-GM  [QFN-28]  133.58 95.05 270 top
U22  TXS02612RTWR  [QFN24_RTW]  146.03 37.33 0 bottom
U23  SI5338P/Q_NC  [QFN-24]  55.69 86.71 180 top
U24  ADV7511  [LQFP-100]  155.65 83.77 180 top
U25  AZ1045-04F  [DFN2510P10E]  153.27 95.63 0 top
U26  AZ1045-04F  [DFN2510P10E]  156.28 95.63 0 top
U27  AZ1045-04F  [DFN2510P10E]  160.48 95.69 0 top
U28  JL2121-N040I  [QFN40-5X5]  93.32 97.64 270 top
U29  LM75  [MICRO8]  160.11 41.69 270 top
U30  -  [SFPX4_CASE]  -7.13 54.27 90 top
U31  AZ1045-04F  [DFN2510P10E]  175.68 95.66 0 top
U33  AZ1045-04F  [DFN2510P10E]  178.72 95.68 0 top
U38  ETA1471FT2G  [SOT23-6]  174.29 41.78 270 top
U171  ETA8156FT2G  [FCTSOT23-6]  176.73 27.5 270 top
U172  ETA1471FT2G  [SOT23-6]  164.64 31.62 270 top
X1  SIT8008-50Mhz/NC  [OSC3_2X2_5]  54.8 93.65 0 top
X2  SIT8008-12Mhz  [OSC3_2X2_5]  146.71 96.44 270 top
Y2  24MHZ  [SX2-1205]  161.88 57.88 0 top
Y3  24MHZ  [SX2-1205]  190.52 34.24 270 top
Y4  25MHZ  [OSC3225]  103.3 95.48 90 top
Y5  27MHZ  [SX2-1205]  167.3 83.07 270 top
Y9  25MHZ  [OSC3225]  185.56 66.84 90 top

## Library data of the parts
C92-C95 C105 C114 C145 C146 C156 C157 C276-C296 C323-C350 C352-C358 C361-C409 C436-C451 C456-C461 C466-C473 C648 C675 C676 C795-C803 C805-C810 C814-C818 C1483-C1494 C1504 C1505 C1507-C1509 C1511 C1512 = CAP NP
C96-C104 C106-C113 C115-C120 C144 C152 C649 C819 C820 C1506 C1510 = C_1
C147 C813 C825 C826 = 47uF
C151 = 18pF
C154 = 22uF/25V
C351 C452-C455 = CAP POL
C673 C674 C811 C812 = CAP_3
C681 = C
CN2 = AJ243_0
D4-D7 = SBL1645CT/TO_0
D9 D10 D20 D35 = BZX84C36/SOT_0
D14-D18 LED1 LED2 = LN211WP
D22 D27 D28 = BZX84C33/SOT_0
F3 = FUSE
J2 J14 = GE_RJ45_2
J3 J4 = DUAL USB
J5 J6 J8 J9 = SFP_CON
J7 = HDMI Connector_0
J10 = CON15_0
J11 = USB_B_3
J12 = Micro SD_0
J13 = HDMI Connector
J15 = HEADER 5X2
J25 = CON2-2_54P
J29-J32 = CONN SOCKET 60x2_0
J33 = HEADER 20x2/M
J34 J35 = CON9_0
KEY2-KEY6 = Button_0
L7-L10 L14-L18 L31 L36 L44 L62-L69 = INDUCTOR
L11-L13 = INDUCTOR_0
L22-L29 = MPZ1608
L70 = CMLE051E-2R2MS
L71 L72 = CHOKE RF-IRON_0
P1 = PCIex4_0
Q9-Q13 = L14P2/TO_1
Q14 = NDT3055L_0
R19-R22 R90-R96 R101-R104 R123-R140 R143-R152 R157-R170 R198-R200 R207 R208 R224 R225 R282 R283 R286 R288 R290 R291 R295-R301 R427 R443 R445-R461 R466 R467 R1025-R1042 R1044 R1045 = RESISTOR
R57-R62 R97-R100 R105 R106 R154-R156 R186-R197 R209-R214 R217-R220 R222 R223 = R
R281 R287 R289 R294 R430 R434 R435 = R1005_0
R468 R470 R471 R1043 R1046 = 100K
R472 = 12K 1%
R473 = 18K 1%
RN1-RN9 RN11 RN19 = RESARR_IS_4/SM
S1-S6 = screw_0
SW1 = SW DIP-2
SW2 = SENS59150-SPST_1
TP1 TP3 TP4 = TP
U9 = SiI9013/9011_5
U10 = M24CO2 PDIP8
U13 U28 = JL2121D-N040I_0
U14 = USB3320C-EZK_6
U15 = USB2514_0
U16 = TPS2051BDBV
U20 = CP2102_0
U22 = TXS02612RTWR_0
U23 = SI5338
U24 = ADV7511_0
U25-U27 U31 U33 = AZ1045-04F_0
U29 = LM75
U30 = SFPX4_CASE
U38 U172 = ETA1471FT2G
U171 = ETA8156FT2G_1
X1 X2 = OSC
Y2-Y5 Y9 = X3_0

## Footprints (pads in the part's own frame, mm; a bottom-side part is the same pattern mirrored in y, then rotated)
2P2_1_27MM
  rect 0.76x1.27 smd: 1(-0.635,-3.81) 2(0.635,-3.81) 3(0.635,3.81) 4(-0.635,3.81)
AXK6A2337YG
  round 0.8 hole 0.8 unplated: (-16.05,1.2) (16.05,1.2)
  rect 0.25x2.3 smd: 1(-14.75,-1.65) 2(-14.75,1.65) 3(-14.25,-1.65) 4(-14.25,1.65) 5(-13.75,-1.65) 6(-13.75,1.65) 7(-13.25,-1.65) 8(-13.25,1.65) 9(-12.75,-1.65) 10(-12.75,1.65) 11(-12.25,-1.65) 12(-12.25,1.65) 13(-11.75,-1.65) 14(-11.75,1.65) 15(-11.25,-1.65) 16(-11.25,1.65) 17(-10.75,-1.65) 18(-10.75,1.65) 19(-10.25,-1.65) 20(-10.25,1.65) 21(-9.75,-1.65) 22(-9.75,1.65) 23(-9.25,-1.65) 24(-9.25,1.65) 25(-8.75,-1.65) 26(-8.75,1.65) 27(-8.25,-1.65) 28(-8.25,1.65) 29(-7.75,-1.65) 30(-7.75,1.65) 31(-7.25,-1.65) 32(-7.25,1.65) 33(-6.75,-1.65) 34(-6.75,1.65) 35(-6.25,-1.65) 36(-6.25,1.65) 37(-5.75,-1.65) 38(-5.75,1.65) 39(-5.25,-1.65) 40(-5.25,1.65) 41(-4.75,-1.65) 42(-4.75,1.65) 43(-4.25,-1.65) 44(-4.25,1.65) 45(-3.75,-1.65) 46(-3.75,1.65) 47(-3.25,-1.65) 48(-3.25,1.65) 49(-2.75,-1.65) 50(-2.75,1.65) 51(-2.25,-1.65) 52(-2.25,1.65) 53(-1.75,-1.65) 54(-1.75,1.65) 55(-1.25,-1.65) 56(-1.25,1.65) 57(-0.75,-1.65) 58(-0.75,1.65) 59(-0.25,-1.65) 60(-0.25,1.65) 61(0.25,-1.65) 62(0.25,1.65) 63(0.75,-1.65) 64(0.75,1.65) 65(1.25,-1.65) 66(1.25,1.65) 67(1.75,-1.65) 68(1.75,1.65) 69(2.25,-1.65) 70(2.25,1.65) 71(2.75,-1.65) 72(2.75,1.65) 73(3.25,-1.65) 74(3.25,1.65) 75(3.75,-1.65) 76(3.75,1.65) 77(4.25,-1.65) 78(4.25,1.65) 79(4.75,-1.65) 80(4.75,1.65) 81(5.25,-1.65) 82(5.25,1.65) 83(5.75,-1.65) 84(5.75,1.65) 85(6.25,-1.65) 86(6.25,1.65) 87(6.75,-1.65) 88(6.75,1.65) 89(7.25,-1.65) 90(7.25,1.65) 91(7.75,-1.65) 92(7.75,1.65) 93(8.25,-1.65) 94(8.25,1.65) 95(8.75,-1.65) 96(8.75,1.65) 97(9.25,-1.65) 98(9.25,1.65) 99(9.75,-1.65) 100(9.75,1.65) 101(10.25,-1.65) 102(10.25,1.65) 103(10.75,-1.65) 104(10.75,1.65) 105(11.25,-1.65) 106(11.25,1.65) 107(11.75,-1.65) 108(11.75,1.65) 109(12.25,-1.65) 110(12.25,1.65) 111(12.75,-1.65) 112(12.75,1.65) 113(13.25,-1.65) 114(13.25,1.65) 115(13.75,-1.65) 116(13.75,1.65) 117(14.25,-1.65) 118(14.25,1.65) 119(14.75,-1.65) 120(14.75,1.65)
BAS16XV2T1G
  rect 0.406x0.406 smd: 1(-0.7,0) 2(0.7,0)
C0402
  rect 0.508x0.508 smd: 1(-0.457,0) 2(0.457,0)
C0603
  rect 0.762x0.762 smd: 1(-0.686,0) 2(0.686,0)
C0805
  rect 1.143x1.27 smd: 1(-0.838,0) 2(0.838,0)
CN1-DCJACK
  rect 3.556x2.032 hole 2.6x0.8: 1(0,0) 3(0,6.1)
  rect 2.032x3.556 hole 0.8x2.6: 2(4.5,2.997)
CON2_2_54P
  round 1.422 hole 0.914: 1(0,0) 2(2.5,0)
D7343
  rect 1.8x2.9 smd: 1(-2.85,0) 2(2.85,0)
DFN2510P10E
  rect 0.25x0.675 smd: 1(-1,-0.437) 2(-0.5,-0.437) 4(0.5,-0.437) 5(1,-0.437) 6(1,0.437) 7(0.5,0.437) 9(-0.5,0.437) 10(-1,0.437)
  rect 0.33x1.549 smd: 3(0,0)
DO-214AC
  rect 1.6x1.676 smd: 1(-1.99,0) 2(1.99,0)
DUAL_USB
  round 1.308 hole 0.8: A1(-3.5,2.75) A2(-1,2.75) A3(1,2.75) A4(3.5,2.75) B1(-3.5,-0.25) B2(-1,-0.25) B3(1,-0.25) B4(3.5,-0.25)
  oval 2.754x3.262 hole 1.738x2.246: S1(-7.5,2.75) S2(-7.5,-2.75) S3(7.5,2.75) S4(7.5,-2.75)
FCTSOT23-6
  rect 0.4x0.7 smd: 1(-0.95,-1.3) 2(0,-1.3) 3(0.95,-1.3) 4(0.95,1.3) 5(0,1.3) 6(-0.95,1.3)
FPC100C047
  rect 0.6x2 smd: 1(-7,-1.125) 2(-6,-1.125) 3(-5,-1.125) 4(-4,-1.125) 5(-3,-1.125) 6(-2,-1.125) 7(-1,-1.125) 8(0,-1.125) 9(1,-1.125) 10(2,-1.125) 11(3,-1.125) 12(4,-1.125) 13(5,-1.125) 14(6,-1.125) 15(7,-1.125)
  rect 2.6x2.1 smd: 16(-9.25,1.125) 17(9.25,1.125)
FUSE_1812
  rect 1.829x3.251 smd: 1(-1.93,0) 2(1.93,0)
GE_RJ45
  round 3.3 hole 3.3 unplated: (0,11.48) (0,0)
  round 1.8 hole 1.3: 11(4.9,-0.885) 12(4.9,1.655) 13(4.9,9.825) 14(4.9,12.365)
  round 2.489 hole 1.8: 15(-3.05,-2.01) 16(-3.05,13.49)
  round 1.524 hole 1.016: P1(-8.89,0.025) P2(-6.35,1.295) P3(-8.89,2.565) P4(-6.35,3.835) P5(-8.89,5.105) P6(-6.35,6.375) P7(-8.89,7.645) P8(-6.35,8.915) P9(-8.89,10.185) P10(-6.35,11.455)
HDMI_A_TYPE
  rect 2.8x0.229 smd: 1(-1.15,-12) 2(-1.15,-11.5) 3(-1.15,-11) 4(-1.15,-10.5) 5(-1.15,-10) 6(-1.15,-9.5) 7(-1.15,-9) 8(-1.15,-8.5) 9(-1.15,-8) 10(-1.15,-7.5) 11(-1.15,-7) 12(-1.15,-6.5) 13(-1.15,-6) 14(-1.15,-5.5) 15(-1.15,-5) 16(-1.15,-4.5) 17(-1.15,-4) 18(-1.15,-3.5) 19(-1.15,-3)
  oval 3x1.4 hole 2.4x0.8: 20(-1.95,-14.75) 21(-1.95,-0.25)
  oval 2x1.4 hole 1.4x0.8: 22(-7.91,-14.75) 23(-7.91,-0.25)
IDC-40J
  rect 1.727x1.727 hole 0.889: 1(-24.13,-1.27)
  round 1.727 hole 0.889: 2(-24.13,1.27) 3(-21.59,-1.27) 4(-21.59,1.27) 5(-19.05,-1.27) 6(-19.05,1.27) 7(-16.51,-1.27) 8(-16.51,1.27) 9(-13.97,-1.27) 10(-13.97,1.27) 11(-11.43,-1.27) 12(-11.43,1.27) 13(-8.89,-1.27) 14(-8.89,1.27) 15(-6.35,-1.27) 16(-6.35,1.27) 17(-3.81,-1.27) 18(-3.81,1.27) 19(-1.27,-1.27) 20(-1.27,1.27) 21(1.27,-1.27) 22(1.27,1.27) 23(3.81,-1.27) 24(3.81,1.27) 25(6.35,-1.27) 26(6.35,1.27) 27(8.89,-1.27) 28(8.89,1.27) 29(11.43,-1.27) 30(11.43,1.27) 31(13.97,-1.27) 32(13.97,1.27) 33(16.51,-1.27) 34(16.51,1.27) 35(19.05,-1.27) 36(19.05,1.27) 37(21.59,-1.27) 38(21.59,1.27) 39(24.13,-1.27) 40(24.13,1.27)
JTAG-10
  rect 1.73x1.73 hole 0.89: 1(0,0)
  round 1.73 hole 0.89: 2(0,2.54) 3(2.54,0) 4(2.54,2.54) 5(5.08,0) 6(5.08,2.54) 7(7.62,0) 8(7.62,2.54) 9(10.16,0) 10(10.16,2.54)
KEY_4X4X1_5
  rect 1.1x0.635 smd: 1(-3.027,1.85) 2(3.027,1.85) 3(-3.027,-1.85) 4(3.027,-1.85)
L4_4X4_2
  rect 2.5x1.5 smd: 1(0,1.85) 2(0,-1.85)
L5_4X5_2
  rect 1.9x2.5 smd: 1(-2.05,0) 2(2.05,0)
L0603
  rect 0.762x0.762 smd: 1(-0.686,0) 2(0.686,0)
L0805
  rect 1.27x1.27 smd: 1(-1.016,0) 2(1.016,0)
LED_0805
  rect 1.25x1.3 smd: 1(0,1) 2(0,-1)
LQFP-100
  oval 2x0.25 smd: 1(-7.75,6) 2(-7.75,5.5) 3(-7.75,5) 4(-7.75,4.5) 5(-7.75,4) 6(-7.75,3.5) 7(-7.75,3) 8(-7.75,2.5) 9(-7.75,2) 10(-7.75,1.5) 11(-7.75,1) 12(-7.75,0.5) 13(-7.75,0) 14(-7.75,-0.5) 15(-7.75,-1) 16(-7.75,-1.5) 17(-7.75,-2) 18(-7.75,-2.5) 19(-7.75,-3) 20(-7.75,-3.5) 21(-7.75,-4) 22(-7.75,-4.5) 23(-7.75,-5) 24(-7.75,-5.5) 25(-7.75,-6) 51(7.75,-6) 52(7.75,-5.5) 53(7.75,-5) 54(7.75,-4.5) 55(7.75,-4) 56(7.75,-3.5) 57(7.75,-3) 58(7.75,-2.5) 59(7.75,-2) 60(7.75,-1.5) 61(7.75,-1) 62(7.75,-0.5) 63(7.75,0) 64(7.75,0.5) 65(7.75,1) 66(7.75,1.5) 67(7.75,2) 68(7.75,2.5) 69(7.75,3) 70(7.75,3.5) 71(7.75,4) 72(7.75,4.5) 73(7.75,5) 74(7.75,5.5) 75(7.75,6)
  oval 0.25x2 smd: 26(-6,-7.75) 27(-5.5,-7.75) 28(-5,-7.75) 29(-4.5,-7.75) 30(-4,-7.75) 31(-3.5,-7.75) 32(-3,-7.75) 33(-2.5,-7.75) 34(-2,-7.75) 35(-1.5,-7.75) 36(-1,-7.75) 37(-0.5,-7.75) 38(0,-7.75) 39(0.5,-7.75) 40(1,-7.75) 41(1.5,-7.75) 42(2,-7.75) 43(2.5,-7.75) 44(3,-7.75) 45(3.5,-7.75) 46(4,-7.75) 47(4.5,-7.75) 48(5,-7.75) 49(5.5,-7.75) 50(6,-7.75) 76(6,7.75) 77(5.5,7.75) 78(5,7.75) 79(4.5,7.75) 80(4,7.75) 81(3.5,7.75) 82(3,7.75) 83(2.5,7.75) 84(2,7.75) 85(1.5,7.75) 86(1,7.75) 87(0.5,7.75) 88(0,7.75) 89(-0.5,7.75) 90(-1,7.75) 91(-1.5,7.75) 92(-2,7.75) 93(-2.5,7.75) 94(-3,7.75) 95(-3.5,7.75) 96(-4,7.75) 97(-4.5,7.75) 98(-5,7.75) 99(-5.5,7.75) 100(-6,7.75)
LVS303010
  rect 3.023x1.016 smd: 1(0,-0.5) 2(0,2.5)
MARK
  round 1 smd: 1(0,0)
MH_250H125
  round 6.35 hole 3.175: 1(0,0)
MICRO8
  oval 0.356x1.27 smd: 1(-0.975,-2.4) 2(-0.325,-2.4) 3(0.325,-2.4) 4(0.975,-2.4) 5(0.975,2.4) 6(0.325,2.4) 7(-0.325,2.4) 8(-0.975,2.4)
MICRO_SD
  rect 0.7x1.8 smd: 1(0,0) 2(-1.1,0) 3(-2.2,0) 4(-3.3,0) 5(-4.4,0) 6(-5.5,0) 7(-6.6,0) 8(-7.7,0) 9(-8.8,0)
  rect 1.6x1.5 smd: 10(4.6,-1.15)
  rect 1.2x1.8 smd: 11(-10,-1.4) 12(-10,-10.9) 13(5.5,-10.9)
MINI_USB_DIP
  round 1.2 hole 0.7: 1(-1.6,0.9) 2(-0.8,-0.3) 3(0,0.9) 4(0.8,-0.3) 5(1.6,0.9)
  oval 1.3x2.4 hole 0.8x1.9: 6(-3.7,0) 7(3.7,0) 8(-3.7,-4.75) 9(3.7,-4.75)
OSC3_2X2_5
  rect 1.3x1.3 smd: 1(0,0) 2(0,-2.1) 3(1.9,-2.1) 4(1.9,0)
OSC3225
  rect 1.397x1.194 smd: 1(-1.1,-0.85) 2(1.1,-0.85) 3(1.1,0.85) 4(-1.1,0.85)
PCIE_8LANE_EDGE
  rect 0.711x3.2 smd: A1(0,0.495) B17(18,0.495) B31(32,0.495) B48(49,0.495)
  rect 0.711x4.293 smd: A2(1,-0.051) A3(2,-0.051) A4(3,-0.051) A5(4,-0.051) A6(5,-0.051) A7(6,-0.051) A8(7,-0.051) A9(8,-0.051) A10(9,-0.051) A11(10,-0.051) A12(13,-0.051) A13(14,-0.051) A14(15,-0.051) A15(16,-0.051) A16(17,-0.051) A17(18,-0.051) A18(19,-0.051) A19(20,-0.051) A20(21,-0.051) A21(22,-0.051) A22(23,-0.051) A23(24,-0.051) A24(25,-0.051) A25(26,-0.051) A26(27,-0.051) A27(28,-0.051) A28(29,-0.051) A29(30,-0.051) A30(31,-0.051) A31(32,-0.051) A32(33,-0.051) A33(34,-0.051) A34(35,-0.051) A35(36,-0.051) A36(37,-0.051) A37(38,-0.051) A38(39,-0.051) A39(40,-0.051) A40(41,-0.051) A41(42,-0.051) A42(43,-0.051) A43(44,-0.051) A44(45,-0.051) A45(46,-0.051) A46(47,-0.051) A47(48,-0.051) A48(49,-0.051) A49(50,-0.051) B1(0,-0.051) B2(1,-0.051) B3(2,-0.051) B4(3,-0.051) B5(4,-0.051) B6(5,-0.051) B7(6,-0.051) B8(7,-0.051) B9(8,-0.051) B10(9,-0.051) B11(10,-0.051) B12(13,-0.051) B13(14,-0.051) B14(15,-0.051) B15(16,-0.051) B16(17,-0.051) B18(19,-0.051) B19(20,-0.051) B20(21,-0.051) B21(22,-0.051) B22(23,-0.051) B23(24,-0.051) B24(25,-0.051) B25(26,-0.051) B26(27,-0.051) B27(28,-0.051) B28(29,-0.051) B29(30,-0.051) B30(31,-0.051) B32(33,-0.051) B33(34,-0.051) B34(35,-0.051) B35(36,-0.051) B36(37,-0.051) B37(38,-0.051) B38(39,-0.051) B39(40,-0.051) B40(41,-0.051) B41(42,-0.051) B42(43,-0.051) B43(44,-0.051) B44(45,-0.051) B45(46,-0.051) B46(47,-0.051) B47(48,-0.051) B49(50,-0.051)
POWER_SW
  round 1.8 hole 1: 1(-5.5,2.5) 2(-5.5,0) 3(-5.5,-2.5) 4(0,2.5) 5(0,0) 6(0,-2.5)
QFN24_RTW
  oval 1x0.25 smd: 1(-2,1.25) 2(-2,0.75) 3(-2,0.25) 4(-2,-0.25) 5(-2,-0.75) 6(-2,-1.25) 13(2,-1.25) 14(2,-0.75) 15(2,-0.25) 16(2,0.25) 17(2,0.75) 18(2,1.25)
  oval 0.25x1 smd: 7(-1.25,-2) 8(-0.75,-2) 9(-0.25,-2) 10(0.25,-2) 11(0.75,-2) 12(1.25,-2) 19(1.25,2) 20(0.75,2) 21(0.25,2) 22(-0.25,2) 23(-0.75,2) 24(-1.25,2)
  rect 2.45x2.45 smd: 25(0,0)
QFN40-5X5
  oval 0.8x0.2 smd: 1(0,4.3) 2(0,3.9) 3(0,3.5) 4(0,3.1) 5(0,2.7) 6(0,2.3) 7(0,1.9) 8(0,1.5) 9(0,1.1) 10(0,0.7) 21(5,0.7) 22(5,1.1) 23(5,1.5) 24(5,1.9) 25(5,2.3) 26(5,2.7) 27(5,3.1) 28(5,3.5) 29(5,3.9) 30(5,4.3)
  oval 0.2x0.8 smd: 11(0.7,0) 12(1.1,0) 13(1.5,0) 14(1.9,0) 15(2.3,0) 16(2.7,0) 17(3.1,0) 18(3.5,0) 19(3.9,0) 20(4.3,0) 31(4.3,5) 32(3.9,5) 33(3.5,5) 34(3.1,5) 35(2.7,5) 36(2.3,5) 37(1.9,5) 38(1.5,5) 39(1.1,5) 40(0.7,5)
  rect 3.4x3.4 smd: 41(2.5,2.5)
QFN-24
  oval 0.25x0.7 smd: 1(-1.25,-1.95) 2(-0.75,-1.95) 3(-0.25,-1.95) 4(0.25,-1.95) 5(0.75,-1.95) 6(1.25,-1.95) 13(1.25,1.95) 14(0.75,1.95) 15(0.25,1.95) 16(-0.25,1.95) 17(-0.75,1.95) 18(-1.25,1.95)
  oval 0.7x0.25 smd: 7(1.95,-1.25) 8(1.95,-0.75) 9(1.95,-0.25) 10(1.95,0.25) 11(1.95,0.75) 12(1.95,1.25) 19(-1.95,1.25) 20(-1.95,0.75) 21(-1.95,0.25) 22(-1.95,-0.25) 23(-1.95,-0.75) 24(-1.95,-1.25)
  rect 2.8x2.8 smd: 25(0,0)
QFN-28
  rect 1x0.3 smd: 1(-2.43,1.5) 2(-2.43,1) 3(-2.43,0.5) 4(-2.43,0) 5(-2.43,-0.5) 6(-2.43,-1) 7(-2.43,-1.5) 15(2.43,-1.5) 16(2.43,-1) 17(2.43,-0.5) 18(2.43,0) 19(2.43,0.5) 20(2.43,1) 21(2.43,1.5)
  rect 0.3x1 smd: 8(-1.5,-2.43) 9(-1,-2.43) 10(-0.5,-2.43) 11(0,-2.43) 12(0.5,-2.43) 13(1,-2.43) 14(1.5,-2.43) 22(1.5,2.43) 23(1,2.43) 24(0.5,2.43) 25(0,2.43) 26(-0.5,2.43) 27(-1,2.43) 28(-1.5,2.43)
  rect 3.15x3.15 smd: 29(0,0)
  rect 0.508x0.508 smd: 30(-2.134,2.134)
QFN-37
  rect 0.25x0.754 smd: 1(-2,-2.688) 2(-1.5,-2.688) 3(-1,-2.688) 4(-0.5,-2.688) 5(0,-2.688) 6(0.5,-2.688) 7(1,-2.688) 8(1.5,-2.688) 9(2,-2.688) 19(2,2.688) 20(1.5,2.688) 21(1,2.688) 22(0.5,2.688) 23(0,2.688) 24(-0.5,2.688) 25(-1,2.688) 26(-1.5,2.688) 27(-2,2.688)
  rect 0.754x0.25 smd: 10(2.688,-2) 11(2.688,-1.5) 12(2.688,-1) 13(2.688,-0.5) 14(2.688,0) 15(2.688,0.5) 16(2.688,1) 17(2.688,1.5) 18(2.688,2) 28(-2.688,2) 29(-2.688,1.5) 30(-2.688,1) 31(-2.688,0.5) 32(-2.688,0) 33(-2.688,-0.5) 34(-2.688,-1) 35(-2.688,-1.5) 36(-2.688,-2)
  rect 3.5x3.5 smd: 37(0,0)
QFP-128HPAD
  oval 1.2x0.18 smd: 1(-7.9,6.2) 2(-7.9,5.8) 3(-7.9,5.4) 4(-7.9,5) 5(-7.9,4.6) 6(-7.9,4.2) 7(-7.9,3.8) 8(-7.9,3.4) 9(-7.9,3) 10(-7.9,2.6) 11(-7.9,2.2) 12(-7.9,1.8) 13(-7.9,1.4) 14(-7.9,1) 15(-7.9,0.6) 16(-7.9,0.2) 17(-7.9,-0.2) 18(-7.9,-0.6) 19(-7.9,-1) 20(-7.9,-1.4) 21(-7.9,-1.8) 22(-7.9,-2.2) 23(-7.9,-2.6) 24(-7.9,-3) 25(-7.9,-3.4) 26(-7.9,-3.8) 27(-7.9,-4.2) 28(-7.9,-4.6) 29(-7.9,-5) 30(-7.9,-5.4) 31(-7.9,-5.8) 32(-7.9,-6.2) 65(7.9,-6.2) 66(7.9,-5.8) 67(7.9,-5.4) 68(7.9,-5) 69(7.9,-4.6) 70(7.9,-4.2) 71(7.9,-3.8) 72(7.9,-3.4) 73(7.9,-3) 74(7.9,-2.6) 75(7.9,-2.2) 76(7.9,-1.8) 77(7.9,-1.4) 78(7.9,-1) 79(7.9,-0.6) 80(7.9,-0.2) 81(7.9,0.2) 82(7.9,0.6) 83(7.9,1) 84(7.9,1.4) 85(7.9,1.8) 86(7.9,2.2) 87(7.9,2.6) 88(7.9,3) 89(7.9,3.4) 90(7.9,3.8) 91(7.9,4.2) 92(7.9,4.6) 93(7.9,5) 94(7.9,5.4) 95(7.9,5.8) 96(7.9,6.2)
  oval 0.18x1.2 smd: 33(-6.2,-7.9) 34(-5.8,-7.9) 35(-5.4,-7.9) 36(-5,-7.9) 37(-4.6,-7.9) 38(-4.2,-7.9) 39(-3.8,-7.9) 40(-3.4,-7.9) 41(-3,-7.9) 42(-2.6,-7.9) 43(-2.2,-7.9) 44(-1.8,-7.9) 45(-1.4,-7.9) 46(-1,-7.9) 47(-0.6,-7.9) 48(-0.2,-7.9) 49(0.2,-7.9) 50(0.6,-7.9) 51(1,-7.9) 52(1.4,-7.9) 53(1.8,-7.9) 54(2.2,-7.9) 55(2.6,-7.9) 56(3,-7.9) 57(3.4,-7.9) 58(3.8,-7.9) 59(4.2,-7.9) 60(4.6,-7.9) 61(5,-7.9) 62(5.4,-7.9) 63(5.8,-7.9) 64(6.2,-7.9) 97(6.2,7.9) 98(5.8,7.9) 99(5.4,7.9) 100(5,7.9) 101(4.6,7.9) 102(4.2,7.9) 103(3.8,7.9) 104(3.4,7.9) 105(3,7.9) 106(2.6,7.9) 107(2.2,7.9) 108(1.8,7.9) 109(1.4,7.9) 110(1,7.9) 111(0.6,7.9) 112(0.2,7.9) 113(-0.2,7.9) 114(-0.6,7.9) 115(-1,7.9) 116(-1.4,7.9) 117(-1.8,7.9) 118(-2.2,7.9) 119(-2.6,7.9) 120(-3,7.9) 121(-3.4,7.9) 122(-3.8,7.9) 123(-4.2,7.9) 124(-4.6,7.9) 125(-5,7.9) 126(-5.4,7.9) 127(-5.8,7.9) 128(-6.2,7.9)
  rect 9x9 smd: 129(0,0)
R0402
  rect 0.508x0.508 smd: 1(-0.457,0) 2(0.457,0)
R0603
  rect 0.889x0.762 smd: 1(-0.762,0) 2(0.762,0)
R1210
  rect 1.2x2.7 smd: 1(1.45,0) 2(-1.45,0)
RN-8P
  rect 1x0.4 smd: 1(0,0) 2(0,-0.8) 3(0,-1.6) 4(0,-2.4) 5(1.858,-2.4) 6(1.858,-1.6) 7(1.858,-0.8) 8(1.858,0)
SATA-7
  round 0.994 hole 0.74: 1(3.81,0) 2(2.54,1.5) 3(1.27,1.5) 4(0,0) 5(-1.27,1.5) 6(-2.54,1.5) 7(-3.81,0)
  round 1.708 hole 1.2: 8(-6.48,2.5) 9(6.48,1.5)
SFP_CON
  round 2.032 hole 1.575x1: (4.1,1.4)
  round 2.032 hole 1.575: (4.1,-8.2)
  rect 2.032x0.508 smd: 1(0,0) 2(0,-0.8) 3(0,-1.6) 4(0,-2.4) 5(0,-3.2) 6(0,-4) 7(0,-4.8) 8(0,-5.6) 9(0,-6.4) 10(0,-7.2) 11(8.2,-6.8) 12(8.2,-6) 13(8.2,-5.2) 14(8.2,-4.4) 15(8.2,-3.6) 16(8.2,-2.8) 17(8.2,-2) 18(8.2,-1.2) 19(8.2,-0.4) 20(8.2,0.4)
SFPX4_CASE
  rect 2.032x2.032 hole 1.067: 1(-28.5,-16.5) 2(-28.5,-26.5) 3(-28.5,-36.5) 4(-28.5,-46.5) 5(-14.25,-15.1) 6(-14.25,-22.2) 7(-14.25,-36.4) 8(-14.25,-43.5) 9(0,-11.5) 10(0,-18.6) 11(0,-32.8) 12(0,-39.9) 13(14.25,-11.5) 14(14.25,-18.6) 15(14.25,-32.8) 16(14.25,-39.9) 17(28.5,-11.5) 18(28.5,-21.5) 19(28.5,-31.5) 20(28.5,-41.5)
SO8
  rect 1.524x0.61 smd: 1(0,0) 2(0,-1.27) 3(0,-2.54) 4(0,-3.81) 5(5.588,-3.81) 6(5.588,-2.54) 7(5.588,-1.27) 8(5.588,0)
SOD-523
  rect 0.5x0.8 smd: 1(0,-0.8) 2(0,0.8)
SOT23
  rect 0.914x0.914 smd: 1(0,0) 2(1.9,0)
  rect 0.914x1.27 smd: 3(0.97,2.03)
SOT23-6
  rect 0.6x1.1 smd: 1(-0.95,-1.25) 2(0,-1.25) 3(0.95,-1.25) 4(0.95,1.25) 5(0,1.25) 6(-0.95,1.25)
SOT-23
  rect 1.397x1.016 smd: 1(0.986,-0.948) 2(0.986,0.952) 3(-1.006,0.002)
SOT-223
  rect 0.991x1.499 smd: 1(-2.286,-3.15) 2(0,-3.15) 3(2.286,-3.15)
  rect 3.277x1.499 smd: 4(0,3.15)
SX2-1205
  rect 1.397x1.194 smd: 1(-1.1,-0.85) 2(1.1,-0.85) 3(1.1,0.85) 4(-1.1,0.85)
TAN-SMB
  rect 1.5x2.5 smd: 1(1.4,0) 2(-1.4,0)
TPS2051BDBV
  rect 1x0.7 smd: 1(0,0) 2(0,-0.95) 3(0,-1.9) 4(2.6,-1.9) 5(2.6,0)
unnamed
  round 1.016 smd: 1(0,0)
unnamed#3
  round 6.35 hole 3 unplated: (-35,25) (-35,-25) (35,25) (35,-25)
USB3320C
  oval 0.711x0.254 smd: 1(-2.3,1.75) 2(-2.3,1.25) 3(-2.3,0.75) 4(-2.3,0.25) 5(-2.3,-0.25) 6(-2.3,-0.75) 7(-2.3,-1.25) 8(-2.3,-1.75) 17(2.3,-1.75) 18(2.3,-1.25) 19(2.3,-0.75) 20(2.3,-0.25) 21(2.3,0.25) 22(2.3,0.75) 23(2.3,1.25) 24(2.3,1.75)
  oval 0.254x0.711 smd: 9(-1.75,-2.3) 10(-1.25,-2.3) 11(-0.75,-2.3) 12(-0.25,-2.3) 13(0.25,-2.3) 14(0.75,-2.3) 15(1.25,-2.3) 16(1.75,-2.3) 25(1.75,2.3) 26(1.25,2.3) 27(0.75,2.3) 28(0.25,2.3) 29(-0.25,2.3) 30(-0.75,2.3) 31(-1.25,2.3) 32(-1.75,2.3)
  rect 3.3x3.3 smd: 33(0,0)

## Nets
1V8_VCC: C105.1 C106.1 C107.1 C108.1 C109.1 C110.1 C111.1 C112.1 C113.1 L12.2 U9.12(CVCC18#12) U9.24(CVCC18#24) U9.36(CVCC18#36) U9.45(CVCC18#45) U9.66(DVCC18) U9.81(CVCC18#81) U9.82(AUDPVCC18) U9.112(CVCC18#112) U9.125(CVCC18#125)
3V3_AVCC: C114.1 C115.1 C116.1 C117.1 C118.1 C119.1 C120.1 L13.2 U9.47(PVCC) U9.49(AVCC#49) U9.53(AVCC#53) U9.57(AVCC#57) U9.61(AVCC#61)
3V3_DVCC: C95.1 C96.1 C97.1 C98.1 C99.1 C100.1 C101.1 C102.1 C103.1 C104.1 L11.2 U9.7(IOVCC#7) U9.19(IOVCC#19) U9.31(IOVCC#31) U9.68(IOVCC#68) U9.77(IOVCC#77) U9.86(XTALVCC) U9.87(REGVCC) U9.98(IOVCC#98) U9.107(IOVCC#107) U9.120(IOVCC#120)
+1.8V: C327.1 C328.1 C329.1 C364.1 C816.2 C817.1 C818.1 C819.1 L12.1 L15.1 L17.1 L18.1 L36.2 L65.1 L69.1 L71.2 R123.2 R165.1 R166.1 R167.1 R467.1 TP3.1 U14.8(REFSEL0) U14.11(REFSEL1) U14.14(REFSEL2) U14.28(VDD18_2) U14.30(VDD18_1) U14.32(VDDIO) U22.5(VCCA)
+3.3V: C94.1 C144.1 C145.1 C157.1 C325.1 C326.1 C333.1 C334.1 C335.1 C354.1 C356.1 C357.1 C362.1 C363.1 C365.1 C366.1 C367.1 C381.1 C436.1 C439.1 C448.1 C449.1 C450.1 C798.1 C803.1 C1489.1 C1494.1 C1508.1 C1509.1 C1510.1 C1511.2 D4.2 D5.2 D6.2 D7.2 D14.1(ANODE) D15.1(ANODE) D16.1(ANODE) D17.1(ANODE) D18.1(ANODE) J2.11(LD1_A) J10.15 J12.4(VDD) J14.11(LD1_A) J15.4 J15.6 J33.39 J33.40 L11.1 L13.1 L14.1 L16.1 L22.1 L23.1 L24.1 L25.1 L26.1 L27.1 L28.1 L29.1 L31.1 L44.2 L63.1 L67.1 L72.2 LED1.1(ANODE) LED2.1(ANODE) R19.1 R20.1 R97.1 R106.2 R124.2 R125.2 R139.1 R146.2 R147.2 R154.1 R155.1 R156.1 R157.1 R169.1 R186.2 R187.2 R189.2 R190.2 R191.1 R192.2 R194.1 R196.2 R197.2 R198.2 R199.2 R200.2 R207.2 R209.2 R210.2 R211.1 R212.1 R213.2 R214.2 R217.2 R218.2 R219.2 R220.2 R222.1 R223.1 R283.2 R296.2 R298.2 R300.2 R427.2 R445.2 R447.2 R461.1 R468.1 R1025.1 R1028.2 R1029.2 R1044.1 TP4.1 U13.29(DVDD3V3) U14.21(VBAT) U15.15(VDD33_3) U15.23(VDD33_4) U22.17(VCCB1) U22.21(VCCB0) U28.29(DVDD3V3) U29.8(VDD) X2.4(VDD)
+3.3V_PCIE: P1.A9(+3.3V#A9) P1.A10(+3.3V#A10) P1.B8(+3.3V#B8)
+5V: C146.1 C147.1 C151.1 C156.1 C353.1 C813.1 C825.1 C826.1 J13.18(5V0) J32.107(54) J32.108(114) J32.109(55) J32.110(115) J32.111(56) J32.112(116) J32.113(57) J32.114(117) J32.115(58) J32.116(118) J32.117(59) J32.118(119) J32.119(60) J32.120 J33.2 L70.2 R160.1 R161.1 R472.1 R1043.1 R1046.1 TP1.1 U16.5(IN)
+12V: C152.1 C154.1 C648.1 C649.1 C814.1 C820.1 C1506.1 C1507.1 D22.2(CATHODE) F3.2 J25.1 R471.1 U38.3(VIN) U171.4(IN) U172.3(VIN)
+12V_PCIE: D27.1(ANODE) P1.A2(+12V#A2) P1.A3(+12V#A3) P1.B1(+12V#B1) P1.B2(+12V#B2) P1.B3(+12V#B3)
AVDD1V8: C400.1 C401.1 C402.1 C403.1 C404.1 C405.1 C406.1 C407.1 C408.1 C409.1 L18.2 U24.24(PVDD1) U24.25(PVDD2) U24.29(AVDD1) U24.34(AVDD2) U24.41(AVDD3)
DVDD1V8: C390.1 C391.1 C392.1 C393.1 C394.1 C395.1 C396.1 C397.1 C398.1 C399.1 L17.2 R158.1 R159.1 U24.1(DVDD1) U24.19(DVDD2) U24.49(DVDD3) U24.76(DVDD4) U24.77(DVDD5)
